# Altium PCB vt18_main_board.PcbDoc (part 2 of 2)
Units mil, origin at the board's own origin, x right, y up, seen from the top; angles counter-clockwise.
Board outline 5511.81 x 5236.22 mil, 4 copper layers (Top Layer, Internal Plane 1, Internal Plane 2, Bottom Layer), stack 30.635 mil thick; 230 components, 148 nets, 952 pads, 623 vias.
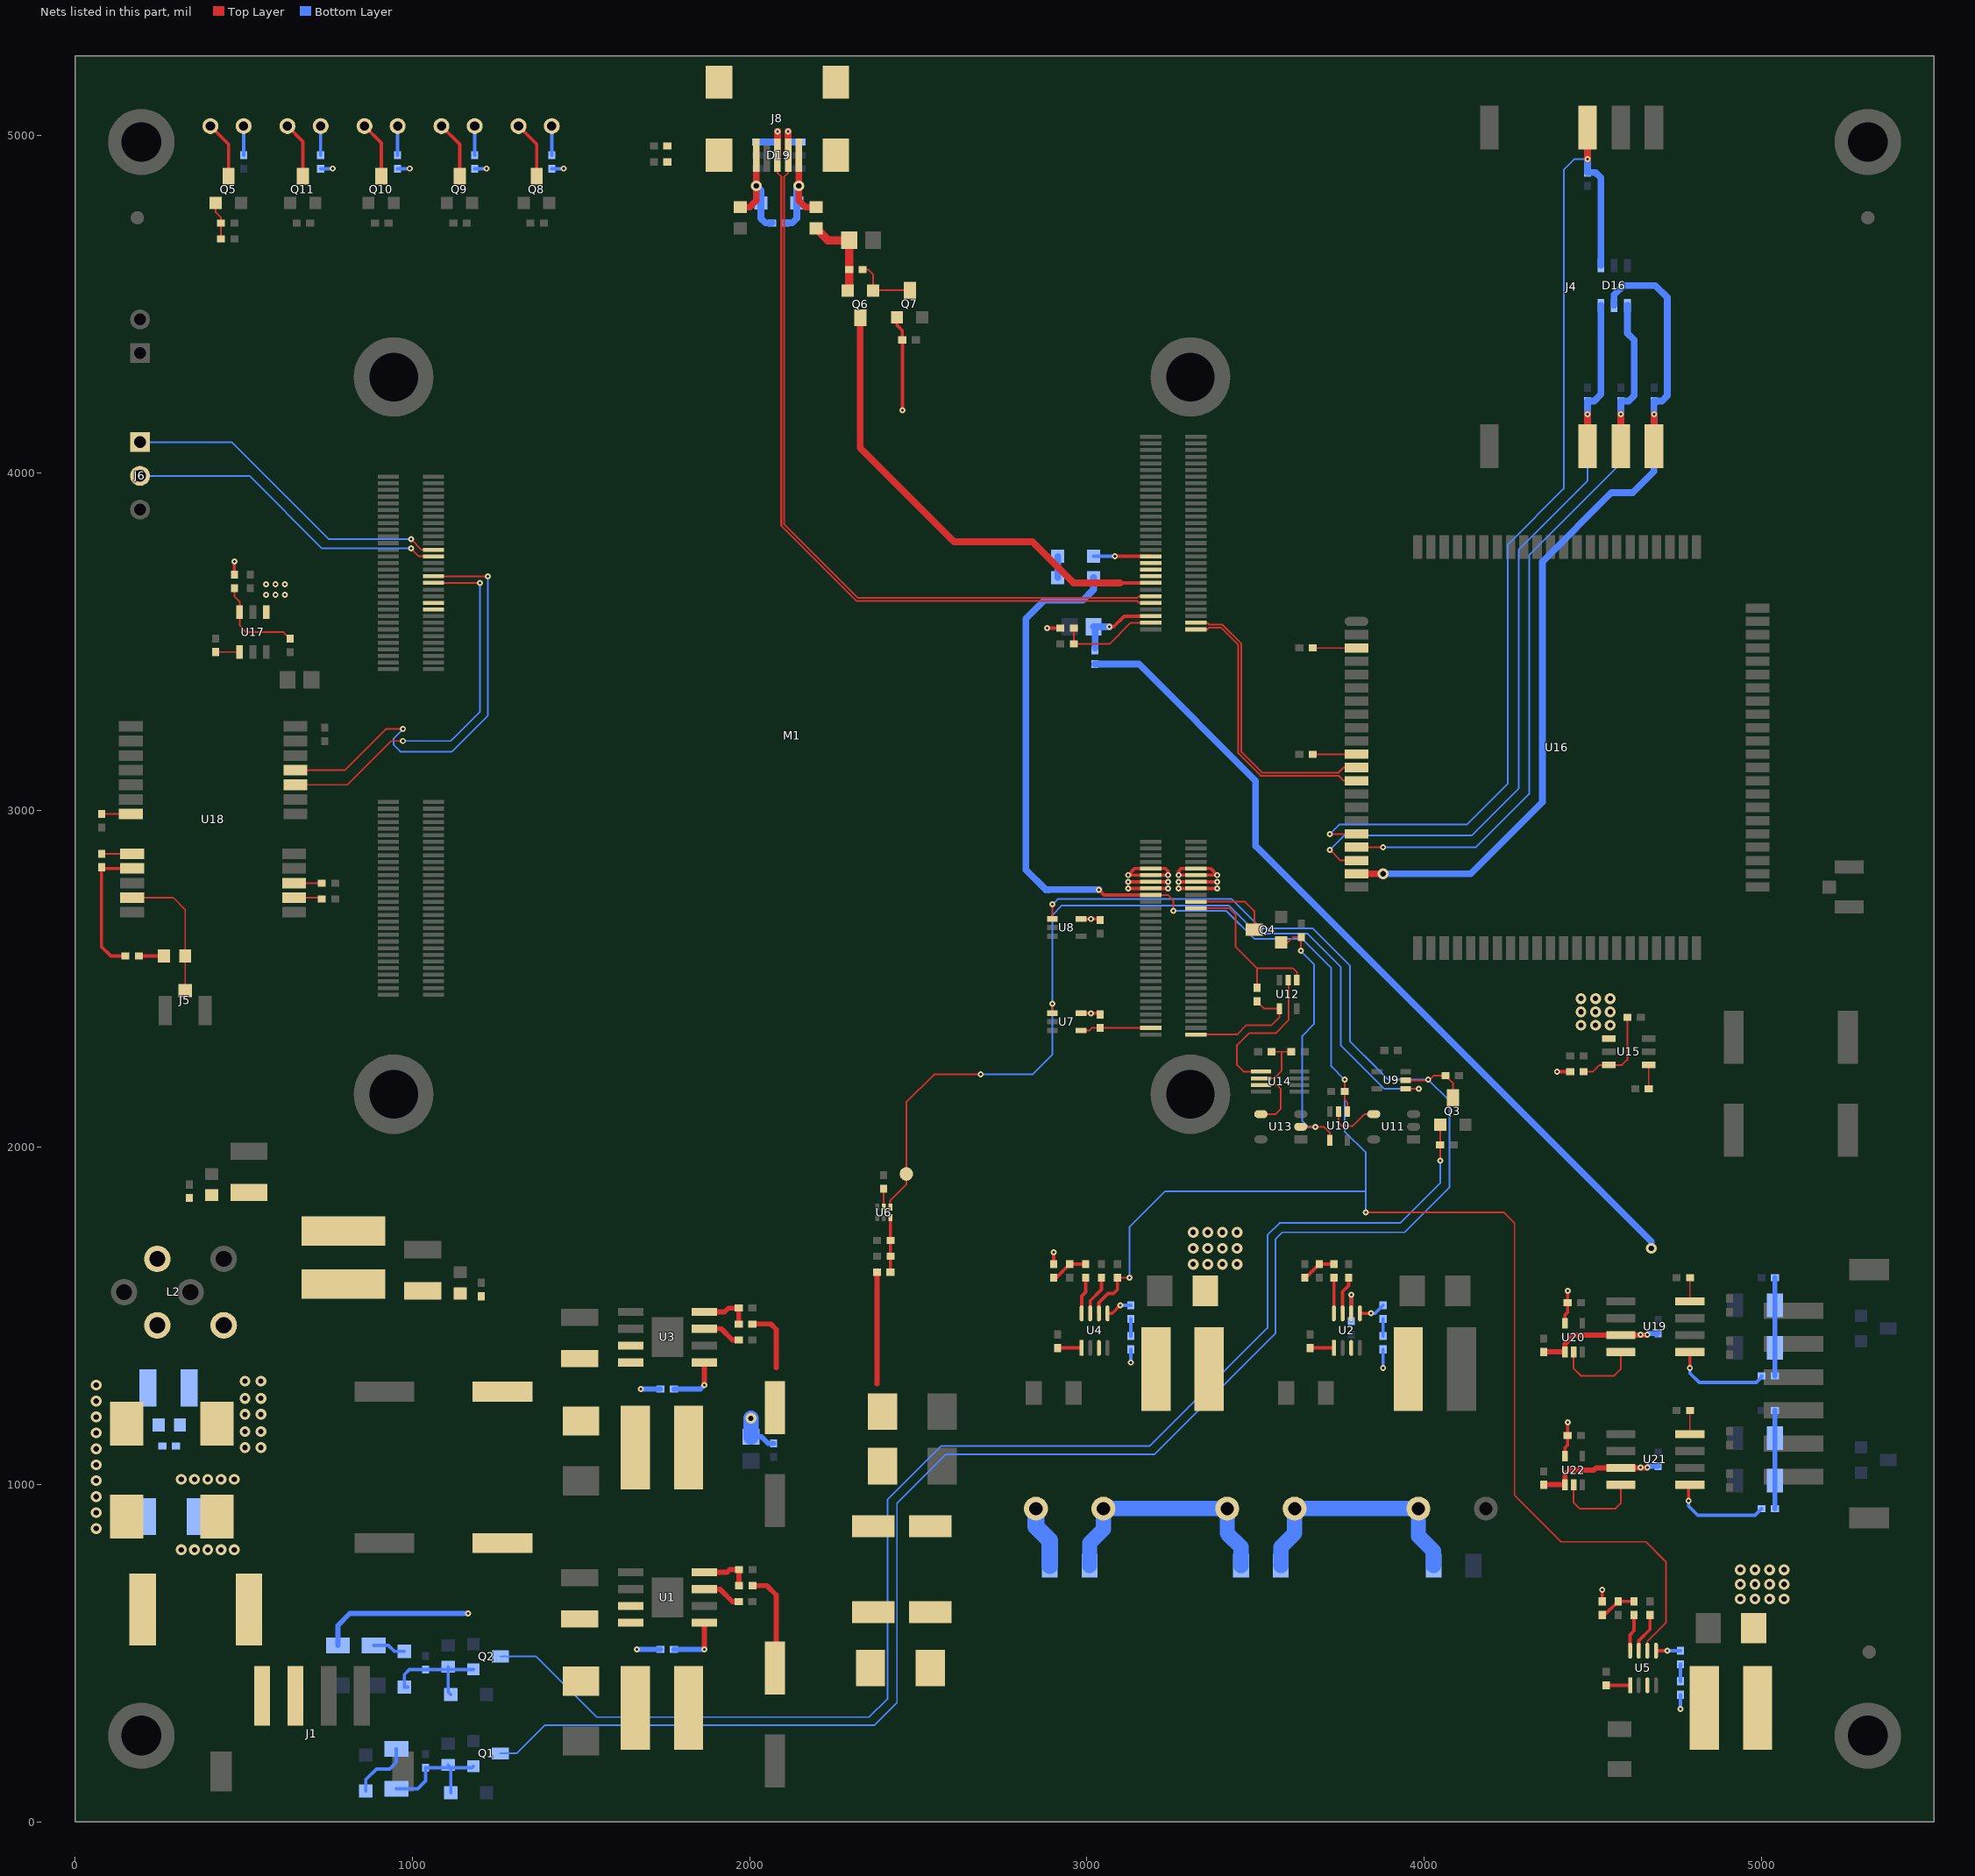
[diagram p4: the nets of this part, all layers, seen from the top]

## Via types
v1: diameter 18, hole 8, Top Layer to Bottom Layer, tented both sides, 433 vias
v2: diameter 32, hole 16, Top Layer to Bottom Layer, tented both sides, 190 vias

## Nets (pads, with @x,y where several pads share a name; then routed paths per layer and width w, separated by ;. In a path a pad name is that pad's centre, name@x,y a point inside that pad or via, vN(x,y) a via of type N, cw(c..) or ccw(c..) an arc to the next point about the centre after c; other vN are vias at no path point) (continued)
MP-LOST: pad. U6.4 U7.1 U9.1 | length 2762.5
  Top Layer w5: U6.4@2417.32,1822.83 2417.32,1842.52 2464.57,1889.76 2464.57,2133.86 2547.24,2216.54 v1(2685.04,2216.54) ; U7.1@2897.64,2397.64 v1(2897.64,2425.2) ; U9.1@3944.88,2173.23 v1(3984.25,2173.23)
  Bottom Layer w5: v1(2685.04,2216.54) 2838.58,2216.54 2897.64,2275.59 v1(2897.64,2425.2) 2897.64,2688.98 2925.95,2717.29 3420.51,2717.29 3503.94,2633.86 3653.54,2633.86 3751.97,2535.43 3751.97,2303.15 3881.89,2173.23 v1(3984.25,2173.23)
MX6-ONOFF: M1.D20 Q4.1 | length 239.8
  Top Layer w5: M1.D20@3322.83,2728.35 3468.5,2728.35 3496.06,2700.79 Q4.1@3496.06,2645.67
NetC1_1: C1.1 C2.1 C4.1 D1.2 D2.2 D3.2 L2.1
  other v2: 62.99,870.08 62.99,917.32 62.99,964.57 62.99,1011.81 62.99,1059.06 62.99,1106.3 62.99,1153.54 62.99,1200.79 62.99,1248.03 62.99,1295.28
NetC6_1: C6.1 C7.1 C8.1 L1.1 L2.3
NetC12_1: C12.1 L3.1 U2.3 | length 54.7
  Bottom Layer w10: v1(3877.95,1346.46) C12.1@3877.95,1401.13
NetC12_2: C12.2 R3.1 | length 50.6
  Bottom Layer w10: C12.2@3877.95,1441.13 R3.1@3877.95,1491.68
NetC14_1: C14.1 D6.2 L4.1 U1.8 | length 70.4
  Bottom Layer w15: v1(1665.35,511.81) C14.1@1735.78,511.81
NetC14_2: C14.2 U1.1 | length 169.1
  Top Layer w15: v1(1866.14,511.81) U1.1@1866.14,590.55
  Bottom Layer w15: C14.2@1775.78,511.81 v1(1866.14,511.81)
NetC17_1: C17.1 D4.1 R4.2 R6.2 R7.1 | length 186.3
  Bottom Layer w50: C17.1@2848.82,929.13 2848.82,875.59 2889.76,834.65 R7.1@2889.76,759.84
NetC17_2: C17.2 C20.1 R7.2 R11.1 | length 739.4
  Bottom Layer w45: R7.2@3007.87,759.84 3007.87,826.77 3048.82,867.72 C17.2@3048.82,929.13 C20.1@3415.75,929.13 3415.75,855.91 3456.69,814.96 R11.1@3456.69,759.84
NetC18_2: C18.2 U2.1 | length 70.9
  Top Layer w10: C18.2@3661.42,1405.32 3732.09,1405.32 U2.1@3732.28,1405.51
NetC20_2: C20.2 C22.1 R11.2 R12.1 | length 741.1
  Bottom Layer w45: R11.2@3574.8,759.84 3574.8,814.96 3615.75,855.91 C20.2@3615.75,929.13 C22.1@3982.68,929.13 3982.68,848.03 4027.56,803.15 R12.1@4027.56,759.84
NetC21_2: C21.2 U2.7 | length 113.4
  Top Layer w10: U2.7@3757.87,1507.87 3757.87,1572.83 3775.59,1590.55 C21.2@3775.59,1613.98
NetC23_1: C23.1 L5.1 U4.3 | length 38.9
  Bottom Layer w10: v1(3129.92,1362.2) C23.1@3129.92,1401.13
NetC23_2: C23.2 R15.1 | length 50.6
  Bottom Layer w10: C23.2@3129.92,1441.13 R15.1@3129.92,1491.68
NetC24_1: C24.1 D8.2 L6.1 U3.8 | length 58.6
  Bottom Layer w15: v1(1677.17,1283.46) C24.1@1735.78,1283.46
NetC24_2: C24.2 U3.1 | length 158.2
  Top Layer w15: v1@1866.14,1299.21 U3.1@1866.14,1362.2
  Bottom Layer w15: C24.2@1775.78,1283.46 1854.33,1283.46 v1(1866.14,1295.28)
NetC31_2: C31.2 U4.1 | length 70.9
  Top Layer w10: C31.2@2913.39,1405.32 2984.06,1405.32 U4.1@2984.25,1405.51
NetC32_2: C32.2 U4.7 | length 120
  Top Layer w10: U4.7@3009.84,1507.87 3009.84,1545.28 3043.31,1578.74 C32.2@3043.31,1613.98
NetC33_1: C33.1 L7.1 U5.3 | length 43.3
  Bottom Layer w10: C33.1@4759.21,377.32 C33.1@4759.84,377.32 v1(4759.84,334.65)
NetC33_2: C33.2 R20.1 | length 50.6
  Bottom Layer w10: C33.2@4759.84,417.32 R20.1@4759.84,467.87
NetC36_1: C36.1 U6.5 | length 54.7
  Top Layer w5: U6.5@2397.64,1822.83 C36.1@2397.64,1877.51
NetC37_2: C37.2 U5.1 | length 70.9
  Top Layer w10: C37.2@4539.37,405.32 4539.56,405.51 U5.1@4610.24,405.51
NetC38_2: C38.2 U5.7 | length 120
  Top Layer w10: U5.7@4635.83,507.87 4635.83,537.4 4669.29,570.87 C38.2@4669.29,613.98
NetC39_1: C39.1 R23.2 R25.1 U6.3 | length 161.5
  Top Layer w10: U6.3@2417.32,1791.34 2417.51,1791.15 R23.2@2417.51,1629.92
NetC40_1: C40.1 D10.2 Q1.2 R28.1 R30.1 | length 364.8
  Bottom Layer w10: R28.1@952.76,98.43 1015.75,98.43 1039.37,122.05 R30.1@1039.37,160.98 C40.1@1114.17,160.98 ; C40.1@1106.3,169.29 1114.17,161.42 C40.1@1114.17,160.98 ; D10.2@1114.17,86.61 C40.1@1114.17,160.98 ; Q1.2@1181.1,165.35 1176.72,160.98 C40.1@1114.17,160.98
NetC41_1: C41.1 D11.2 D12.2 Q2.2 R35.1 | length 344.9
  Bottom Layer w10: D11.2@986.66,399.61 D11.2@976.38,399.61 976.38,437.01 991.68,452.31 R35.1@1039.37,452.31 C41.1@1106.3,452.31 ; C41.1@1106.3,460.63 C41.1@1106.3,452.31 ; D12.2@1114.17,377.95 1106.3,385.83 C41.1@1106.3,452.31 ; Q2.2@1181.1,452.76 1180.66,452.31 C41.1@1106.3,452.31
NetC42_1: C42.1 R38.2 U14.6 | length 185.5
  Top Layer w5: U14.6@3515.75,2204.72 3555.12,2204.72 3576.65,2226.25 3576.65,2283.46 ; R38.2@3547.43,2283.46 3576.65,2283.46 ; C42.1@3605.86,2283.46 3576.65,2283.46
NetC44_2: C44.2 R43.2 U15.6 | length 270.5
  Top Layer w5: R43.2@4472.44,2224.41 4500,2224.41 4519.68,2244.09 U15.6@4547.24,2244.09 4586.61,2244.09 4602.17,2259.65 C44.2@4602.17,2385.83
NetC51_2: C51.2 R51.2 U17.6 | length 288.2
  Top Layer w5: R51.2@476.38,3653.54 R51.2@472.44,3657.48 472.44,3633.86 488.19,3618.11 U17.6@488.19,3586.61 488.19,3547.24 507.87,3527.56 618.3,3527.56 C51.2@637.8,3508.06
NetC59_1: C59.1 R59.2 R60.1 R61.1 | length 291.3
  Bottom Layer w15: R60.1@5039.81,1322.83 C59.1@5039.81,1614.17
NetC65_1: C65.1 R63.2 R64.1 R65.1 | length 291.3
  Bottom Layer w15: R64.1@5039.81,929.13 C65.1@5039.81,1220.47
NetC67_1: C67.1 D20.1 J8.5 L10.2 | length 330.2
  Top Layer w20: L10.2@1972.44,4787.4 2000,4787.4 2019.69,4807.09 J8.5@2019.69,4940.94
  Bottom Layer w20: v2(2019.68,4850.39) 2033.46,4836.61 D20.1@2033.46,4799.21 2033.46,4753.94 2047.24,4740.16 C67.1@2066.49,4740.16
NetD5_2: D5.2 R4.1 R6.1
NetD9_2: D9.2 R28.2 | length 184.6
  Bottom Layer w10: D9.2@862.2,92.52 862.2,125.98 893.7,157.48 933.07,157.48 952.76,177.17 R28.2@952.76,216.54
NetD11_1: D11.1 R34.2 | length 97.9
  Bottom Layer w10: R34.2@885.83,523.62 929.13,523.62 946.85,505.91 D11.1@976.38,505.91
NetD13_1: D13.1 D14.2 | length 63
  Bottom Layer w20: D14.2@2913.39,3688.98 D13.1@2913.39,3751.97
NetD15_1: D15.1 R44.2 | length 86.4
  Bottom Layer w10: R44.2@500,4941.13 D15.1@500,5027.56
NetD15_2: D15.2 Q5.1 | length 170.6
  Top Layer w10: D15.2@401.57,5027.56 455.32,4973.81 Q5.1@455.32,4879.21
NetD21_1: D21.1 R70.2 | length 86.4
  Bottom Layer w10: R70.2@1413.39,4941.13 D21.1@1413.39,5027.56
NetD21_2: D21.2 Q8.1 | length 170.6
  Top Layer w10: D21.2@1314.96,5027.56 1368.71,4973.81 Q8.1@1368.71,4879.21
NetD22_1: D22.1 R71.2 | length 86.4
  Bottom Layer w10: R71.2@1185.04,4941.13 D22.1@1185.04,5027.56
NetD22_2: D22.2 Q9.1 | length 170.6
  Top Layer w10: D22.2@1086.61,5027.56 1140.36,4973.81 Q9.1@1140.36,4879.21
NetD23_1: D23.1 R72.2 | length 86.4
  Bottom Layer w10: R72.2@956.69,4941.13 D23.1@956.69,5027.56
NetD23_2: D23.2 Q10.1 | length 169
  Top Layer w10: D23.2@858.27,5027.56 908.08,4977.75 Q10.1@908.08,4879.21
NetD24_1: D24.1 R73.2 | length 86.4
  Bottom Layer w10: R73.2@728.35,4941.13 D24.1@728.35,5027.56
NetD24_2: D24.2 Q11.1 | length 167.3
  Top Layer w10: D24.2@629.92,5027.56 675.8,4981.69 Q11.1@675.8,4879.21
NetF1_2: F1.2 J1.1
NetJ5_1: J5.1 L8.2 U18.11 | length 416.3
  Top Layer w4.7: U18.11@169.29,2740.16 291.34,2740.16 326.77,2704.72 J5.1@326.77,2460.63
NetL8_1: L8.1 R58.1 | length 70.4
  Top Layer w10: R58.1@189.42,2566.93 L8.1@259.84,2566.93
NetQ1_1: Q1.1 Q3.1 R27.2 U8.1 U9.2 | length 6177.7
  Top Layer w5: U8.1@2897.64,2677.17 v1(2897.64,2720.47) ; U9.2@3944.88,2198.83 v1@4011.81,2198.83 ; v1@4013.79,2198.83 4027.56,2212.6 R27.2@4062.8,2212.6 4085.24,2190.16 Q3.1@4085.24,2146.93
  Bottom Layer w5: Q1.1@1261.1,203.35 1309.65,203.35 1393.7,287.4 2370.08,287.4 2437.01,354.33 2437.01,944.88 2582.68,1090.55 3200.79,1090.55 3559.06,1448.82 3559.06,1728.35 3578.74,1748.03 3940.94,1748.03 4074.8,1881.89 4074.8,2137.8 v1(4011.81,2200.79) 3893.7,2200.79 ; v1(2897.64,2720.47) 2913.39,2736.22 3429.13,2736.22 3515.75,2649.61 3669.29,2649.61 3779.53,2539.37 3779.53,2314.96 3893.7,2200.79 ; 3822.83,2271.65 3893.7,2200.79
NetQ2_1: Q2.1 Q3.2 R31.2 | length 4196.9
  Top Layer w5: v1(4047.24,1960.63) 4047.24,2007.69 R31.2@4047.06,2007.87 4047.24,2008.06 Q3.2@4047.24,2066.93
  Bottom Layer w5: Q2.1@1261.1,490.76 1367.51,490.76 1547.24,311.02 2354.33,311.02 2409.45,366.14 2409.45,956.69 2566.93,1114.17 3185.04,1114.17 3535.43,1464.57 3535.43,1740.16 3570.87,1775.59 3929.13,1775.59 4047.24,1893.7 v1(4047.24,1960.63)
NetQ4_2: Q4.2 R39.1 U10.4 U13.2 | length 803.2
  Top Layer w5: Q4.2@3576.06,2607.67 3595.86,2607.67 3611.17,2622.98 R39.1@3635.12,2622.98 3633.86,2621.72 v1(3633.86,2582.68) ; U13.2@3633.86,2061.02 v1(3677.17,2061.02) 3702.76,2061.02 3720.46,2043.32 U10.4@3720.46,2021.3
  Bottom Layer w5: v1(3633.86,2582.68) 3673.23,2543.31 3673.23,2365.39 3638.55,2330.71 3638.55,2077.99 3655.51,2061.02 v1(3677.17,2061.02)
NetQ5_2: Q5.2 R47.2 R48.2 | length 112.7
  Top Layer w5: Q5.2@417.32,4799.21 417.32,4771.65 432.88,4756.09 R48.2@432.88,4740.16 R47.2@432.88,4692.91
NetQ6_1: Q6.1 Q7.1 R67.1 | length 194.5
  Top Layer w5: R67.1@2335.09,4602.36 2350.83,4602.36 2366.14,4587.06 Q6.1@2366.14,4539.37 2367.4,4540.63 Q7.1@2475.01,4540.63
NetR1_1: R1.1 R2.1 U1.4 | length 152.7
  Top Layer w15: U1.4@1866.14,740.55 1933.46,740.55 1940.95,748.03 R1.1@1968.5,748.03 R2.1@1968.5,700.79
NetR3_2: R3.2 U2.5 | length 78.8
  Top Layer w10: U2.5@3809.06,1507.87 v1(3842.52,1507.87)
  Bottom Layer w10: v1(3842.52,1507.87) 3854.14,1507.87 R3.2@3877.95,1531.68
NetR5_1: R5.1 U2.6 | length 117.7
  Top Layer w10: U2.6@3783.46,1523.62 v1(3783.46,1562.99)
  Bottom Layer w10: R5.1@3783.46,1484.69 v1(3783.46,1562.99)
NetR8_1: R8.1 R9.2 R10.1 | length 103.2
  Top Layer w10: R9.2@3645.67,1613.98 3648.98,1613.98 R10.1@3688.98,1653.98 R8.1@3732.28,1653.98
NetR8_2: R8.2 U2.8 | length 106.1
  Top Layer w10: U2.8@3732.28,1507.87 R8.2@3732.28,1613.98
NetR13_1: R13.1 R14.1 U3.4 | length 153.9
  Top Layer w15: U3.4@1866.14,1512.2 1925.59,1512.2 1937.01,1523.62 R13.1@1968.06,1523.62 R14.1@1968.06,1476.38
NetR15_2: R15.2 U4.5 | length 78.8
  Top Layer w10: U4.5@3061.02,1507.87 3074.8,1507.87 v1(3098.43,1531.5)
  Bottom Layer w10: v1(3098.43,1531.5) 3129.73,1531.5 R15.2@3129.92,1531.68
NetR16_1: R16.1 R17.2 R18.1 | length 111.1
  Top Layer w10: R17.2@2901.57,1613.98 2908.82,1613.98 R18.1@2948.82,1653.98 R16.1@2996.06,1653.98
NetR16_2: R16.2 U4.8 | length 111
  Top Layer w10: U4.8@2984.25,1507.87 2984.25,1559.06 2996.06,1570.87 R16.2@2996.06,1613.98
NetR20_2: R20.2 U5.5 | length 72.8
  Top Layer w10: U5.5@4687.01,507.87 v1(4720.47,507.87)
  Bottom Layer w10: v1(4720.47,507.87) R20.2@4759.84,507.87
NetR21_1: R21.1 R22.2 R24.1 | length 111.1
  Top Layer w10: R22.2@4527.56,613.98 4534.8,613.98 R24.1@4574.8,653.98 R21.1@4622.05,653.98
NetR21_2: R21.2 U5.8 | length 111
  Top Layer w10: U5.8@4610.24,507.87 4610.24,555.12 4622.05,566.93 R21.2@4622.05,613.98
NetR45_2: R45.2 U15.1 | length 72.6
  Top Layer w5: U15.1@4665.35,2244.09 4665.35,2177.35 R45.2@4669.48,2173.23
NetR49_2: R49.2 U16.3 | length 129.7
  Top Layer w4.7: R49.2@3669.48,3480.31 U16.3@3799.21,3480.31
NetR50_2: R50.2 U16.11 | length 129.7
  Top Layer w4.7: R50.2@3669.48,3165.35 U16.11@3799.21,3165.35
NetR52_2: R52.2 U17.1 | length 70.9
  Top Layer w5: R52.2@417.32,3468.31 417.51,3468.5 U17.1@488.19,3468.5
NetR54_1: R54.1 U18.14 | length 83.9
  Top Layer w5: U18.14@649.61,2740.16 727.91,2740.16 R54.1@731.84,2736.22
NetR55_1: R55.1 U18.15 | length 82.2
  Top Layer w5: U18.15@649.61,2783.46 R55.1@731.84,2783.46
NetR56_1: R56.1 R58.2 U18.9 | length 409.9
  Top Layer w5: R56.1@78.74,2830.27 R56.1@82.24,2826.77
  Top Layer w10: R56.1@78.74,2830.27 78.74,2594.49 106.3,2566.93 R58.2@149.42,2566.93 ; R56.1@82.24,2826.77 U18.9@169.29,2826.77
NetR56_2: R56.2 U18.8 | length 90.6
  Top Layer w5: R56.2@78.74,2870.27 78.93,2870.08 U18.8@169.29,2870.08
NetR57_2: R57.2 U18.7 | length 86.7
  Top Layer w5: R57.2@78.74,2988.38 78.93,2988.19 U18.7@165.35,2988.19
NetR60_2: R60.2 U19.5 | length 297.2
  Top Layer w10: v1(4787.4,1346.46) U19.5@4787.4,1393.5
  Bottom Layer w10: v1(4787.4,1346.46) 4787.4,1330.71 4814.96,1303.15 4984.25,1303.15 4999.81,1318.71 R60.2@4999.81,1322.83
NetR62_1: R62.1 U19.8 | length 70.9
  Top Layer w5: U19.8@4787.4,1543.5 4787.4,1613.73 R62.1@4787.84,1614.17
NetR64_2: R64.2 U21.5 | length 300.2
  Top Layer w10: v1(4783.46,952.76) 4783.46,995.87 U21.5@4787.4,999.8
  Bottom Layer w10: v1(4783.46,952.76) 4783.46,937.01 4810.83,909.64 4980.32,909.64 R64.2@4999.81,929.13
NetR66_1: R66.1 U21.8 | length 70.9
  Top Layer w5: U21.8@4787.4,1149.8 4787.4,1220.03 R66.1@4787.84,1220.47
NetR78_1: R78.1 U1.3 | length 117.3
  Top Layer w15: U1.3@1866.14,690.55 1911.81,690.55 1948.82,653.54 R78.1@1968.06,653.54
NetR79_1: R79.1 U3.3 | length 115.6
  Top Layer w15: U3.3@1866.14,1462.2 1915.75,1462.2 1948.82,1429.13 R79.1@1968.06,1429.13
NetU10_2: U10.2 U11.4 | length 156.6
  Top Layer w5: U10.2@3746.06,2106.3 3746.06,2072.84 3755.91,2062.99 3787.4,2062.99 3822.83,2098.43 U11.4@3850.39,2098.43
NetU12_2: U12.2 U14.5 | length 441.5
  Top Layer w5: U14.5@3515.75,2224.41 3464.57,2224.41 3444.88,2244.09 3444.88,2303.15 3480.32,2338.58 3559.06,2338.58 3598.43,2377.95 3598.43,2494.09 U12.2@3596.45,2496.06
NetU13_4: U13.4 U14.7 | length 188.6
  Top Layer w5: U13.4@3515.75,2098.43 3559.06,2098.43 3574.8,2114.17 3574.8,2173.23 3562.99,2185.04 U14.7@3515.75,2185.04
NetU19_4: U19.4 U20.2 | length 257.1
  Top Layer w5: U20.2@4442.92,1393.7 4442.92,1344.48 4464.57,1322.83 4562.99,1322.83 4582.68,1342.52 U19.4@4582.68,1393.5
NetU21_4: U21.4 U22.2 | length 261.7
  Top Layer w5: U22.2@4442.92,1000 4442.92,946.84 4460.63,929.13 4566.93,929.13 4582.68,944.88 U21.4@4582.68,999.8
OTG-ID: M1.C43
OTG-OC: M1.C41
OTG-PWREN: M1.C39
OTG-SH-GND: C68.2 J8.6 J8.7 J8.8 J8.9 R69.1
OTG_N: D19.4 J8.2 M1.C49 | length 2406.7
  Top Layer w5.3: J8.2@2114.17,4940.94 2114.17,4889.08 2102.93,4877.83 2102.93,3846.81 2321.22,3628.52 3149.49,3628.52 3154.83,3633.86 M1.C49@3188.98,3633.86
  Top Layer w20: J8.2@2114.17,4940.94 v1(2114.17,5011.81)
  Bottom Layer w20: v1(2114.17,5011.81) 2114.17,4988.19 2122.05,4980.31 D19.4@2145.67,4980.31
OTG_P: D19.3 J8.3 M1.C51 | length 2445.3
  Top Layer w5.3: J8.3@2082.68,4940.94 2082.68,4889.08 2093.93,4877.83 2093.93,3843.08 2317.49,3619.52 3149.49,3619.52 3154.83,3614.17 M1.C51@3188.98,3614.17
  Top Layer w20: J8.3@2082.68,4940.94 v1(2082.68,5011.81)
  Bottom Layer w20: D19.3@2027.56,4980.31 2074.8,4980.31 2082.68,4988.19 v1(2082.68,5011.81)
OTGVBUS: C66.2 L9.1 Q6.2 R67.2 | length 264.4
  Top Layer w25: L9.1@2196.85,4724.41 2232.28,4688.98 C66.2@2295.28,4688.98 2295.28,4543.5 Q6.2@2291.14,4539.37
P2V8-OUT: D14.1 M1.D17 R19.1 R36.1 U4.6 U5.6 U10.1 | length 6071.7
  Top Layer w5: R19.1@3090.55,1613.73 3090.99,1614.17 v1(3125.98,1614.17) ; M1.D17@3188.98,2748.03 3240.16,2748.03 3255.91,2732.28 v1(3255.91,2700.79) ; v1(3763.78,2200.79) 3763.78,2165.8 R36.1@3764.22,2165.35 3764.22,2141.29 3771.65,2133.86 U10.1@3771.65,2106.3 ; v1(3826.77,1807.09) 4236.22,1807.09 4267.72,1775.59 4267.72,968.5 4405.51,830.71 4657.48,830.71 4716.54,771.65 4716.54,590.55 4661.42,535.43 U5.6@4661.42,507.87
  Top Layer w10: U4.6@3035.43,1507.87 3035.43,1539.37 3062.99,1566.93 3078.74,1566.93 3090.55,1578.74 R19.1@3090.55,1613.73 ; v1(3035.43,2763.78) 3051.18,2748.03 M1.D17@3188.98,2748.03
  Bottom Layer w5: v1(3125.98,1614.17) 3125.98,1763.78 3232.28,1870.08 3826.77,1870.08 ; v1(3255.91,2700.79) 3413.39,2700.79 3496.06,2618.11 3637.8,2618.11 3724.41,2531.5 3724.41,2240.16 v1(3763.78,2200.79) 3763.78,2047.24 3826.77,1984.25 3826.77,1870.08 ; v1(3826.77,1807.09) 3826.77,1870.08
  Bottom Layer w20: D14.1@3019.68,3688.98 3019.68,3653.54 2988.19,3622.05 2874.02,3622.05 2818.9,3566.93 2818.9,2822.83 2877.95,2763.78 2887.32,2763.78 2887.7,2764.16 3035.06,2764.16 v1(3035.43,2763.78)
P3V3: C28.1 C57.1 C63.1 L5.2 M1.D9 M1.D10 M1.D11 M1.D12 M1.D13 M1.D14 M1.D15 M1.D16 Q7.2 R17.1 R26.1 R29.1 R40.2 R43.1 R51.1 R68.2 R70.1 R71.1 R72.1 R73.1 U7.5 U8.5 U15.4 U17.4 U20.5 U22.5 | length 1871.2
  Top Layer w10: R51.1@472.44,3697.48 v1(472.44,3736.41) ; Q7.2@2437.01,4460.63 2437.01,4437.2 2452.57,4421.65 R68.2@2452.57,4393.7 2452.95,4393.32 2452.76,4393.12 v1(2452.76,4185.04) ; v1(2881.89,3539.37) R40.2@2921.07,3539.37 ; R17.1@2901.57,1653.98 v1(2901.57,1688.98) ; U7.5@2982.64,2397.64 3035.87,2397.64 R26.1@3039.37,2394.14 ; U8.5@2982.64,2677.17 3035.87,2677.17 R29.1@3039.37,2673.67 ; v1(3122.05,2767.72) M1.D15@3188.98,2767.72 v1(3240.16,2767.72) ; v1(3122.05,2787.4) M1.D13@3188.98,2787.4 v1(3240.16,2787.4) ; v1(3271.65,2767.72) M1.D16@3322.83,2767.72 v1(3385.83,2767.72) ; v1(3271.65,2787.4) M1.D14@3322.83,2787.4 v1(3385.83,2787.4) ; v1(4393.7,2224.41) R43.1@4432.44,2224.41 ; U22.5@4417.32,1085 4417.32,1110.24 4424.76,1117.67 C63.1@4424.76,1145.67 4424.76,1184.6 v1(4425.2,1185.04) ; U20.5@4417.32,1478.7 4417.32,1503.94 4424.76,1511.37 C57.1@4424.76,1539.37 4424.76,1574.36 v1(4425.2,1574.8) ; v1(3122.05,2807.09) M1.D11@3188.98,2807.09 v1(3240.16,2807.09) 3240.16,2818.9 3232.28,2826.77 M1.D9@3188.98,2826.77 3141.73,2826.77 v1(3122.05,2807.09) ; v1(3271.65,2807.09) 3271.65,2818.9 3279.53,2826.77 M1.D10@3322.83,2826.77 3366.14,2826.77 v1(3385.83,2807.09) M1.D12@3322.83,2807.09 v1(3271.65,2807.09)
  Bottom Layer w10: R73.1@728.35,4901.13 763.34,4901.13 v1(763.78,4901.57) ; R72.1@956.69,4901.13 991.68,4901.13 v1(992.13,4901.57) ; R71.1@1185.04,4901.13 1220.03,4901.13 v1(1220.47,4901.57) ; R70.1@1413.39,4901.13 1448.38,4901.13 v1(1448.82,4901.57)
  other v1: 3011.81,2397.64 3011.81,2677.17 566.93,3637.8 594.49,3637.8 622.05,3637.8 566.93,3669.29 594.49,3669.29 622.05,3669.29
  other v2: 3314.96,1653.54 3358.27,1653.54 3401.57,1653.54 3444.88,1653.54 3314.96,1700.79 3358.27,1700.79 3401.57,1700.79 3444.88,1700.79 3314.96,1748.03 3358.27,1748.03 3401.57,1748.03 3444.88,1748.03 4464.57,2362.2 4507.87,2362.2 4551.18,2362.2 4464.57,2401.57 4507.87,2401.57 4551.18,2401.57 4464.57,2440.94 4507.87,2440.94 4551.18,2440.94
P5V0: C35.1 C55.1 C56.1 C61.1 C62.1 L7.2 R22.1 R42.2 U19.3 U20.1 U21.3 U22.1 | length 3284.7
  Top Layer w10: R22.1@4527.56,653.98 v1(4527.56,688.98)
  Top Layer w15: C62.1@4354.33,999.56 4354.77,1000 U22.1@4417.32,1000 4417.32,1031.5 4429.13,1043.31 4502.66,1043.31 4509.15,1049.8 U21.3@4582.68,1049.8 4660.04,1049.8 v1(4661.42,1051.18) ; C56.1@4354.33,1393.26 4354.77,1393.7 U20.1@4417.32,1393.7 4417.32,1417.32 4443.5,1443.5 U19.3@4582.68,1443.5 v1@4660.04,1443.5
  Bottom Layer w15: v1(4661.42,1051.18) 4664.91,1054.68 C61.1@4692.91,1054.68 ; v1(4661.42,1444.88) 4664.91,1448.38 C55.1@4692.91,1448.38 C55.1@4689.42,1444.88
  Bottom Layer w20: R42.2@3023.62,3432.88 3153.73,3432.88 3500,3086.61 3500,2893.7 4673.23,1720.47 v2(4673.23,1700.79)
  other v1: 4641.73,1051.18 4641.73,1444.88
  other v2: 4937.01,661.42 4980.32,661.42 5023.62,661.42 5066.93,661.42 4937.01,704.72 4980.32,704.72 5023.62,704.72 5066.93,704.72 4937.01,748.03 4980.32,748.03 5023.62,748.03 5066.93,748.03
P8V0: C19.1 D5.1 L4.2 R2.2 | length 219.4
  Top Layer w15: R2.2@2008.5,700.79 2051.18,700.79 2078.74,673.23 2078.74,535.43
P8V5: C27.2 C29.2 C30.1 D7.1 L6.2 R14.2 R23.1 | length 652.6
  Top Layer w15: R14.2@2008.06,1476.38 2062.99,1476.38 2078.74,1460.63 2078.74,1346.46 ; 2377.51,1298.77 R23.1@2377.51,1629.92
  Bottom Layer w15: C27.2@2003.94,1141.73 2035.43,1141.73 2054.93,1122.24 C29.2@2070.87,1122.24
  Bottom Layer w45: C27.2@2003.94,1141.73 v2(2003.94,1196.85)
PGND: C1.2 C2.2 C4.2 D3.1 J1.2 L2.2
  other v2: 503.94,1110.24 551.18,1110.24 503.94,1157.48 551.18,1157.48 503.94,1208.66 551.18,1208.66 503.94,1255.91 551.18,1255.91 503.94,1307.09 551.18,1307.09
PMIC-ON-REQ: M1.D22 R37.1 U12.1 | length 515.1
  Top Layer w5: M1.D22@3322.83,2708.66 3421.26,2708.66 3440.94,2688.98 3440.94,2594.49 3503.94,2531.5 ; R37.1@3503.94,2472.88 3503.94,2531.5 ; U12.1@3622.05,2496.06 3622.05,2519.69 3610.24,2531.5 3503.94,2531.5
PMIC-PWRON: M1.D60 R37.2 U12.4 | length 370.4
  Top Layer w5: M1.D60@3322.83,2334.65 3444.88,2334.65 3472.44,2362.2 3547.24,2362.2 3570.85,2385.81 U12.4@3570.85,2411.06 3525.76,2411.06 R37.2@3503.94,2432.88
PWR-STATUS: M1.D57 R26.2 U7.4 | length 209.6
  Top Layer w5: U7.4@2982.64,2346.44 3007.86,2346.44 3015.75,2354.33 M1.D57@3188.98,2354.33
PWRIN: D1.1 D2.1 F1.1
  other v2: 314.96,807.09 354.33,807.09 393.7,807.09 433.07,807.09 472.44,807.09 314.96,1015.75 354.33,1015.75 393.7,1015.75 433.07,1015.75 472.44,1015.75
RGMII-PWR: D13.2 M1.C37 | length 169.3
  Top Layer w10: v1(3082.68,3751.97) M1.C37@3188.98,3751.97
  Bottom Layer w10: D13.2@3019.68,3751.97 v1(3082.68,3751.97)
SIMCLK: C48.1 D16.6 J4.3 U16.19 | length 2365.8
  Top Layer w5: v1(3720.47,2881.89) 3751.97,2850.39 U16.19@3799.21,2850.39
  Top Layer w20: J4.3@4484.25,4078.74 v1(4484.25,4173.23)
  Bottom Layer w5: v1(3720.47,2881.89) 3763.78,2925.2 4141.73,2925.2 4279.53,3062.99 4279.53,3771.65 4484.25,3976.38 v1(4484.25,4173.23)
  Bottom Layer w20: v1(4484.25,4173.23) C48.1@4484.25,4212.16 4503.5,4212.16 4523.62,4232.28 D16.6@4523.62,4496.06
SIMDATA: C47.1 D16.1 J4.6 U16.17 | length 3078.9
  Top Layer w5: v1(3720.47,2929.13) U16.17@3799.21,2929.13
  Top Layer w20: v1(4484.25,4929.13) J4.6@4484.25,5023.62
  Bottom Layer w5: v1(3720.47,2929.13) 3748.03,2956.69 4125.98,2956.69 4248.03,3078.74 4248.03,3787.4 4413.39,3952.76 4413.39,4897.64 4444.88,4929.13 v1(4484.25,4929.13)
  Bottom Layer w20: v1(4484.25,4929.13) C47.1@4484.25,4890.2 4507.43,4890.2 4523.62,4874.02 D16.1@4523.62,4614.17
SIMRST: C50.1 D16.4 J4.2 U16.18 | length 2270.9
  Top Layer w5: U16.18@3799.21,2889.76 v1(3877.95,2889.76)
  Top Layer w20: J4.2@4582.68,4078.74 v1(4582.68,4173.23)
  Bottom Layer w5: v1(3877.95,2889.76) 4153.54,2889.76 4311.02,3047.24 4311.02,3755.91 4582.68,4027.56 v1(4582.68,4173.23)
  Bottom Layer w20: v1(4582.68,4173.23) C50.1@4582.68,4212.16 4605.86,4212.16 4622.05,4228.35 4622.05,4393.7 4602.36,4413.39 D16.4@4602.36,4496.06
SIMVCC: C49.1 D16.5 J4.1 U16.20 | length 2648.6
  Top Layer w20: U16.20@3799.21,2811.02 v2(3877.95,2811.02) ; J4.1@4681.1,4078.74 v1(4681.1,4173.23)
  Bottom Layer w20: v2(3877.95,2811.02) 4137.8,2811.02 4350.39,3023.62 4350.39,3736.22 4555.12,3940.94 4618.11,3940.94 4681.1,4003.94 v1(4681.1,4173.23) C49.1@4681.1,4212.16 4704.28,4212.16 4720.47,4228.35 4720.47,4519.68 4685.04,4555.12 4590.55,4555.12 4562.99,4527.56 D16.5@4562.99,4496.06
UART1-RXD: J6.2 M1.A26 | length 968.9
  Top Layer w5: v1(996.06,3775.59) 1019.69,3751.97 M1.A26@1062.99,3751.97
  Bottom Layer w5: J6.2@192.91,3990.55 517.32,3990.55 732.28,3775.59 v1(996.06,3775.59)
UART1-TXD: J6.1 M1.A24 | length 1002.2
  Top Layer w5: v1(996.06,3803.15) 1027.56,3771.65 M1.A24@1062.99,3771.65
  Bottom Layer w5: J6.1@192.91,4090.55 464.57,4090.55 751.97,3803.15 v1(996.06,3803.15)
UART3-RXD: M1.A34 U18.20 | length 1156.6
  Top Layer w5: U18.20@653.54,3074.8 807.09,3074.8 937.01,3204.72 v1(972.44,3204.72) ; M1.A34@1062.99,3673.23 v1(1200.79,3673.23)
  Bottom Layer w5: v1(972.44,3204.72) 1114.17,3204.72 1200.79,3291.34 v1(1200.79,3673.23)
UART3-TXD: M1.A32 U18.21 | length 1334.6
  Top Layer w5: U18.21@653.54,3118.11 799.21,3118.11 921.26,3240.16 v1(972.44,3240.16) ; M1.A32@1062.99,3692.91 v1(1224.41,3692.91)
  Bottom Layer w5: v1(972.44,3240.16) 944.88,3212.6 944.88,3192.91 964.57,3173.23 1118.11,3173.23 1224.41,3279.53 v1(1224.41,3692.91)
UART4-RXD: M1.A42
UART4-TXD: M1.A40
USB-H1-OC: M1.C57 R40.1 R41.1 | length 301.2
  Top Layer w5: R40.1@2961.07,3539.37 R41.1@2961.07,3492.13 3066.93,3492.13 3129.92,3555.12 M1.C57@3188.98,3555.12
USB-H1-VBUS: C43.1 M1.C55 R42.1 | length 247.1
  Top Layer w10: v1(3066.93,3543.31) 3078.74,3543.31 3110.24,3574.8 M1.C55@3188.98,3574.8
  Bottom Layer w10: C43.1@3019.68,3543.31 C43.1@3024.06,3538.93
  Bottom Layer w20: C43.1@3019.68,3543.31 v1(3066.93,3543.31) ; R42.1@3024.06,3480.31 C43.1@3024.06,3538.93
USB-HOST_N: M1.C58 U16.12 | length 854.9
  Top Layer w5.3: M1.C58@3322.83,3555.12 3356.98,3555.12 3362.32,3549.78 3401.37,3549.78 3457.82,3493.32 3457.82,3172.1 3519.12,3110.8 3745.94,3110.8 3761.13,3125.98 U16.12@3799.21,3125.98
USB-HOST_P: M1.C60 U16.13 | length 854.9
  Top Layer w5.3: M1.C60@3322.83,3535.43 3356.98,3535.43 3362.32,3540.78 3397.64,3540.78 3448.82,3489.59 3448.82,3168.37 3515.39,3101.8 3745.94,3101.8 3761.13,3086.61 U16.13@3799.21,3086.61
USB-OTG-VBUS: M1.C45 Q6.3 | length 1412.5
  Top Layer w10: 3098.43,3673.23 M1.C45@3188.98,3673.23
  Top Layer w20: Q6.3@2328.14,4459.37 2328.14,4073.43 2606.3,3795.28 2838.58,3795.28 2960.63,3673.23 3098.43,3673.23
VBAT: C3.1 C5.1 C9.1 C10.1 C11.1 C15.1 C25.1 L1.2 R33.1 U1.7 U3.7 | length 459.6
  Bottom Layer w15: R33.1@779.53,523.62 779.53,582.68 814.96,618.11 v1(1165.35,618.11)
VBUSF: C67.2 D20.2 J8.1 L9.2 | length 331.1
  Top Layer w20: J8.1@2145.67,4940.94 2145.67,4807.09 2165.35,4787.4 L9.2@2196.85,4787.4
  Bottom Layer w20: C67.2@2106.49,4740.16 2125.98,4740.16 2139.76,4753.94 D20.2@2139.76,4799.21 2139.76,4844.49 v2(2145.67,4850.39)
pads on no net: D16.3 D19.1 D19.5 D19.6 Designator49. Designator50. Designator51. Designator52. Designator53. Designator54. J4. J4.5 J8.4 M1. M1.A1 M1.A2 M1.A3 M1.A4 M1.A6 M1.A7 M1.A8 M1.A9 M1.A10 M1.A12 M1.A13 M1.A14 M1.A15 M1.A16 M1.A18 M1.A19 M1.A21 M1.A22 M1.A23 M1.A27 M1.A29 M1.A33 M1.A35 M1.A36 M1.A38 M1.A39 M1.A41 M1.A45 M1.A46 M1.A47 M1.A51 M1.A52 M1.A53 M1.A54 M1.B1 M1.B3 M1.B4 M1.B5 M1.B6 M1.B7 M1.B8 M1.B9 M1.B10 M1.B11 M1.B12 M1.B13 M1.B14 M1.B15 M1.B16 M1.B17 M1.B18 M1.B19 M1.B20 M1.B21 M1.B22 M1.B23 M1.B24 M1.B25 M1.B26 M1.B28 M1.B29 M1.B30 M1.B31 M1.B32 M1.B33 M1.B34 M1.B35 M1.B36 M1.B37 M1.B38 M1.B39 M1.B40 M1.B41 M1.B42 M1.B43 M1.B44 M1.B45 M1.B46 M1.B47 M1.B48 M1.B49 M1.B50 M1.B51 M1.B52 M1.B53 M1.B54 M1.C1 M1.C2 M1.C3 M1.C4 M1.C5 M1.C6 M1.C7 M1.C8 M1.C9 M1.C10 M1.C11 M1.C12 M1.C13 M1.C14 M1.C15 M1.C16 M1.C17 M1.C18 M1.C19 M1.C20 M1.C21 M1.C22 M1.C23 M1.C24 M1.C25 M1.C26 M1.C27 M1.C28 M1.C29 M1.C30 M1.C31 M1.C32 M1.C33 M1.C34 M1.C35 M1.C36 M1.C38 M1.C40 M1.C42 M1.C44 M1.C46 M1.C48 M1.C50 M1.C59 M1.D18 M1.D19 M1.D21 M1.D23 M1.D24 M1.D25 M1.D27 M1.D32 M1.D34 M1.D35 M1.D36 M1.D37 M1.D38 M1.D39 M1.D40 M1.D42 M1.D44 M1.D46 M1.D48 M1.D49 M1.D50 M1.D52 M1.D54 M1.D55 M1.D56 U1.2 U1.5 U3.2 U3.5 U11.1 U13.1 U14.3 U16.4 U16.6 U16.7 U16.8 U16.9 U16.15 U16.16 U16.21 U16.22 U16.23 U16.24 U16.25 U16.26 U16.27 U16.28 U16.29 U16.30 U16.31 U16.32 U16.33 U16.34 U16.35 U16.36 U16.42 U16.44 U16.45 U16.46 U16.47 U16.48 U16.49 U16.50 U16.52 U16.53 U16.54 U16.55 U16.56 U16.59 U16.66 U16.67 U16.68 U16.69 U16.70 U16.71 U16.72 U16.73 U16.74 U16.75 U16.76 U16.79 U16.83 U16.84 U16.85 U16.86 U16.87 U18.1 U18.2 U18.3 U18.4 U18.5 U18.6 U18.16 U18.17 U18.18 U18.19 U18.22

## Polygon pours and split planes (outlines as drawn)
GND on Top Layer "Top Layer-No Net 1" (solid, remove dead copper, pour order 75): 2854.33,1409.45 2881.89,1437.01 2940.94,1437.01 2952.76,1448.82 2952.76,1547.24 2968.5,1562.99 2972.44,1566.93 2972.44,1637.8 2980.32,1645.67 3141.73,1645.67 3149.61,1637.8 3149.61,1527.56 3161.42,1515.75 3248.03,1515.75 3248.03,1519.69 3259.84,1531.5 3259.84,1775.59 3283.46,1799.21 3476.38,1799.21 3500,1775.59 3500,1192.91 3519.68,1173.23 3610.24,1173.23 3625.98,1188.98 3625.98,1421.26 3641.73,1437.01 3677.17,1437.01 3700.79,1460.63 3708.66,1468.5 3708.66,1562.99 3708.66,1622.05 3720.47,1633.86 3807.09,1633.86 3834.65,1606.3 3858.27,1582.68 3858.27,1559.06 3858.27,1535.43 3877.95,1515.75 3996.06,1515.75 4007.87,1527.56 4007.87,1767.72 4035.43,1795.28 4305.24,1795.28 4332.8,1767.72 5511.81,1767.72 5511.81,5236.22 0,5236.22 0,2154.25 20.39,2133.86 681.1,2133.86 712.6,2102.36 842.52,1972.44 2854.33,1972.44
GND on Top Layer "Top Layer-No Net 1" (solid, remove dead copper, pour order 74): 5145.67,393.7 5145.67,759.84 5145.67,783.46 5118.11,811.02 5110.24,818.9 5035.43,818.9 4925.2,818.9 4720.47,818.9 4692.91,846.46 4677.17,862.2 4496.06,862.2 4413.39,862.2 4311.02,964.57 4287.4,988.19 4287.4,1192.91 4287.4,1767.72 5401.57,1767.72 5511.81,1767.72 5511.81,393.7
GND on Top Layer "Top Layer-No Net 1" (solid, remove dead copper, pour order 73): 20.39,2133.86 681.1,2133.86 681.1,1921.26 929.13,1921.26 968.5,1881.89 968.5,1665.35 984.25,1649.61 988.19,1645.67 1035.43,1645.67 1090.55,1645.67 1122.05,1614.17 1173.23,1614.17 1188.98,1598.43 1228.35,1598.43 1240.16,1598.43 1275.59,1598.43 1326.77,1547.24 1381.89,1492.13 1417.32,1456.69 1452.76,1456.69 1523.62,1456.69 1566.93,1456.69 1578.74,1468.5 1582.68,1472.44 1582.68,1523.62 1582.68,1543.31 1598.43,1559.06 1688.98,1559.06 1704.72,1543.31 1704.72,1377.95 1712.6,1370.08 1803.15,1370.08 1811.02,1377.95 1811.02,1547.24 1822.83,1559.06 1988.19,1559.06 2000,1547.24 2000,1511.81 2007.87,1503.94 2023.62,1503.94 2078.74,1503.94 2098.43,1484.25 2110.24,1472.44 2110.24,1440.94 2110.24,1417.32 2133.86,1393.7 2456.69,1393.7 2496.06,1354.33 2685.04,1354.33 2712.6,1326.77 2712.6,1259.84 2712.6,1208.66 2712.6,1204.72 2720.47,1196.85 2767.72,1196.85 2862.2,1196.85 2877.95,1212.6 2877.95,1346.46 2854.33,1370.08 2854.33,1972.44 842.52,1972.44 681.1,2133.86
GND on Top Layer "Top Layer-No Net 1" (solid, remove dead copper, pour order 72): 129.92,1519.69 39.37,1519.69 0,1559.06 0,1566.93 0,2133.86 511.81,2133.86 681.1,2133.86 681.1,1921.26 425.2,1921.26 377.95,1921.26 346.46,1889.76 200.79,1889.76 149.61,1838.58 149.61,1645.67 196.85,1598.43 196.85,1551.18 196.85,1547.24 169.29,1519.69
P8V5 on Top Layer "Top Layer-No Net 1" (solid, remove dead copper, pour order 54): 1818.9,1259.84 1877.95,1259.84 1889.76,1259.84 1992.13,1362.2 2444.88,1362.2 2464.57,1342.52 2464.57,1169.29 2440.94,1145.67 2232.28,1145.67 2200.79,1114.17 2188.98,1102.36 2051.18,1102.36 2043.31,1102.36 1964.57,1023.62 1901.57,960.63 1822.83,960.63 1775.59,960.63 1763.78,972.44 1763.78,1248.03 1775.59,1259.84
NetC24_1 on Top Layer "Top Layer-No Net 1" (solid, remove dead copper, pour order 51): 1622.05,1377.95 1688.98,1377.95 1692.91,1374.02 1692.91,1326.77 1692.91,1303.15 1724.41,1271.65 1724.41,968.5 1716.54,960.63 1610.24,960.63 1598.43,972.44 1598.43,1082.68 1574.8,1106.3 1433.07,1106.3 1417.32,1122.05 1417.32,1271.65 1440.94,1295.28 1468.5,1295.28 1511.81,1295.28 1578.74,1295.28 1594.49,1311.02 1602.36,1318.9 1602.36,1334.65 1602.36,1374.02 1606.3,1377.95
VBAT on Top Layer "Top Layer-No Net 1" (solid, remove dead copper, pour order 46): 637.8,1649.61 862.2,1649.61 897.64,1649.61 944.88,1649.61 968.5,1625.98 980.32,1614.17 1007.87,1614.17 1086.61,1614.17 1110.24,1590.55 1153.54,1590.55 1161.42,1590.55 1181.1,1570.87 1228.35,1570.87 1259.84,1570.87 1338.58,1492.13 1401.57,1429.13 1688.98,1429.13 1692.91,1425.2 1692.91,1397.64 1688.98,1393.7 1598.43,1393.7 1586.61,1381.89 1582.68,1377.95 1582.68,1370.08 1582.68,1334.65 1570.87,1322.83 1535.43,1322.83 1429.13,1322.83 1401.57,1295.28 1389.76,1283.46 1389.76,692.91 1421.26,661.42 1685.04,661.42 1688.98,657.48 1688.98,625.98 1685.04,622.05 1602.36,622.05 1578.74,598.43 1578.74,562.99 1551.18,535.43 1204.72,535.43 1110.24,629.92 1110.24,1358.27 1082.68,1385.83 1055.12,1413.39 850.39,1413.39 751.97,1413.39 610.24,1555.12 610.24,1614.17 610.24,1629.92 629.92,1649.61
NetC6_1 on Top Layer "Top Layer-No Net 1" (solid, remove dead copper, pour order 44): 220.47,1610.24 255.91,1610.24 279.53,1610.24 311.02,1641.73 311.02,1665.35 389.76,1744.09 523.62,1744.09 578.74,1688.98 740.16,1688.98 921.26,1688.98 940.94,1708.66 940.94,1870.08 925.2,1885.83 460.63,1885.83 440.94,1866.14 381.89,1866.14 374.02,1858.27 212.6,1858.27 181.1,1826.77 181.1,1649.61
PGND on Top Layer "Top Layer-No Net 1" (solid, remove dead copper, pour order 39): 460.63,1527.56 543.31,1527.56 586.61,1527.56 655.51,1458.66 708.66,1405.51 749.35,1364.82 749.35,517.07 696.85,464.57 696.85,279.53 681.1,263.78 633.86,263.78 618.11,279.53 618.11,755.91 555.12,818.9 523.62,850.39 523.62,925.2 523.62,1047.24 492.13,1078.74 401.57,1078.74 307.09,1078.74 291.34,1094.49 291.34,1334.65 342.52,1385.83 362.2,1405.51 362.2,1480.31 362.2,1500 389.76,1527.56
GND on Top Layer "Top Layer-No Net 1" (solid, remove dead copper, pour order 71): 4889.76,2165.35 5283.46,2165.35 5326.77,2165.35 5338.58,2165.35 5358.27,2145.67 5358.27,2141.73 5358.27,1909.45 5358.27,1885.83 5338.58,1866.14 4822.83,1866.14 4803.15,1885.83 4803.15,2145.67 4822.83,2165.35
GND on Top Layer "Top Layer-No Net 1" (solid, remove dead copper, pour order 70): 4807.09,503.94 4858.27,503.94 4874.02,503.94 4889.76,519.68 4889.76,700.79 4874.02,716.54 4787.4,716.54 4771.65,700.79 4771.65,519.69 4787.4,503.94
P3V3 on Top Layer "Top Layer-No Net 1" (solid, remove dead copper, pour order 61): 3307.09,1173.23 3456.69,1173.23 3472.44,1188.98 3472.44,1755.91 3460.63,1767.72 3303.15,1767.72 3291.34,1755.91 3291.34,1188.98
CORE-PWR on Top Layer "Top Layer-No Net 1" (solid, remove dead copper, pour order 62): 4216.54,1173.23 4055.12,1173.23 4039.37,1188.98 4039.37,1751.97 4055.12,1767.72 4216.54,1767.72 4232.28,1751.97 4232.28,1188.98
P5V0 on Top Layer "Top Layer-No Net 1" (solid, remove dead copper, pour order 63): 4929.13,177.17 5082.68,177.17 5098.43,192.91 5098.43,767.72 5086.61,779.53 4925.2,779.53 4913.39,767.72 4913.39,192.91
M3V3 on Top Layer "Top Layer-No Net 1" (solid, remove dead copper, pour order 64): 4799.21,2267.72 4746.06,2267.72 4645.67,2267.72 4633.86,2279.53 4633.86,2468.5 4673.23,2507.87 4673.23,2625.98 4681.1,2633.86 4736.22,2633.86 4744.09,2625.98 4744.09,2523.62 4783.46,2484.25 4791.34,2476.38 4862.2,2476.38 5338.58,2476.38 5358.27,2456.69 5358.27,2413.39 5358.27,2287.4 5338.58,2267.72
P3V3 on Top Layer "Top Layer-No Net 1" (solid, remove dead copper, pour order 65): 4527.56,2303.15 4562.99,2303.15 4570.87,2303.15 4578.74,2311.02 4578.74,2397.64 4578.74,2452.76 4570.87,2460.63 4444.88,2460.63 4437.01,2452.76 4437.01,2311.02 4444.88,2303.15 4519.68,2303.15
M3V3 on Top Layer "Top Layer-No Net 1" (solid, remove dead copper, pour order 66): 4673.23,2614.17 4673.23,2681.1 4673.23,2685.04 4637.8,2720.47 4637.8,3673.23 4673.23,3708.66 4673.23,3818.9 4681.1,3826.77 4736.22,3826.77 4744.09,3818.9 4744.09,3708.66 4767.72,3685.04 4779.53,3673.23 4779.53,3559.06 4779.53,2720.47 4744.09,2685.04 4744.09,2614.17
OTG-SH-GND on Top Layer "Top Layer-No Net 1" (solid, remove dead copper, pour order 67): 1775.59,4850.39 1866.14,4850.39 1944.88,4850.39 1956.69,4862.2 1956.69,5062.99 1972.44,5078.74 2185.04,5078.74 2200.79,5062.99 2200.79,4862.2 2212.6,4850.39 2366.14,4850.39 2381.89,4866.14 2381.89,5196.85 2362.2,5216.54 1763.78,5216.54 1748.03,5200.79 1748.03,4862.2 1759.84,4850.39
GPS-PWR on Top Layer "Top Layer-No Net 1" (solid, remove dead copper, pour order 68): 535.43,3496.06 578.74,3496.06 598.43,3496.06 610.24,3484.25 653.54,3484.25 661.42,3476.38 661.42,3354.33 645.67,3338.58 590.55,3283.46 590.55,3240.16 590.55,3232.28 598.43,3224.41 610.24,3224.41 692.91,3224.41 759.84,3224.41 767.72,3216.54 767.72,3192.91 759.84,3185.04 535.43,3185.04 511.81,3208.66 511.81,3488.19 519.68,3496.06
P3V3 on Top Layer "Top Layer-No Net 1" (solid, remove dead copper, pour order 69): 566.93,3551.18 586.61,3551.18 629.92,3551.18 637.8,3559.06 637.8,3677.17 637.8,3681.1 629.92,3688.98 578.74,3688.98 559.06,3688.98 551.18,3681.1 551.18,3559.06 559.06,3551.18
NetF1_2 on Top Layer "Top Layer-No Net 1" (solid, remove dead copper, pour order 40): 480.32,263.78 515.75,263.78 578.74,263.78 590.55,275.59 590.55,740.16 574.8,755.91 440.94,755.91 425.2,740.16 425.2,275.59 437.01,263.78
PWRIN on Top Layer "Top Layer-No Net 1" (solid, remove dead copper, pour order 42): 173.23,492.13 263.78,492.13 381.89,492.13 397.64,507.87 397.64,748.03 421.26,771.65 429.13,779.53 476.38,779.53 480.32,779.53 496.06,795.28 496.06,1031.5 480.32,1047.24 307.09,1047.24 291.34,1031.5 291.34,830.71 240.16,779.53 236.22,775.59 169.29,775.59 137.8,775.59 125.98,763.78 125.98,507.87 141.73,492.13
NetC1_1 on Top Layer "Top Layer-No Net 1" (solid, remove dead copper, pour order 47): 137.8,803.15 106.3,803.15 35.43,803.15 19.68,818.9 19.68,1472.44 39.37,1492.13 177.17,1492.13 212.6,1527.56 283.46,1527.56 307.09,1503.94 307.09,1413.39 307.09,1389.76 263.78,1346.46 263.78,1275.59 263.78,842.52 224.41,803.15
NetC14_1 on Top Layer "Top Layer-No Net 1" (solid, remove dead copper, pour order 43): 1622.05,606.3 1685.04,606.3 1688.98,602.36 1688.98,515.75 1720.47,484.25 1720.47,200.79 1708.66,188.98 1606.3,188.98 1594.49,200.79 1594.49,303.15 1570.87,326.77 1559.06,338.58 1456.69,338.58 1417.32,338.58 1397.64,358.27 1397.64,496.06 1409.45,507.87 1562.99,507.87 1602.36,547.24 1602.36,578.74 1602.36,598.43 1610.24,606.3
NetC23_1 on Top Layer "Top Layer-No Net 1" (solid, remove dead copper, pour order 53): 3031.5,1440.94 3039.37,1440.94 3043.31,1437.01 3043.31,1433.07 3043.31,1385.83 3043.31,1374.02 3055.12,1362.2 3086.61,1362.2 3098.42,1374.02 3098.43,1417.32 3098.43,1460.63 3098.43,1480.31 3110.24,1492.13 3251.97,1492.13 3259.84,1484.25 3259.84,1188.98 3248.03,1177.17 3244.09,1173.23 3204.72,1173.23 3043.31,1173.23 3027.56,1188.98 3027.56,1437.01
NetC12_1 on Top Layer "Top Layer-No Net 1" (solid, remove dead copper, pour order 56): 3779.53,1440.94 3787.4,1440.94 3791.34,1437.01 3791.34,1377.95 3803.15,1366.14 3834.65,1366.14 3846.46,1377.95 3846.46,1472.44 3862.2,1488.19 3996.06,1488.19 4007.87,1476.38 4007.87,1188.98 3992.13,1173.23 3791.34,1173.23 3775.59,1188.98 3775.59,1437.01 3779.53,1440.94
NetC33_1 on Top Layer "Top Layer-No Net 1" (solid, remove dead copper, pour order 57): 4657.48,440.94 4665.35,440.94 4669.29,437.01 4669.29,377.95 4677.17,370.08 4685.04,362.2 4704.72,362.2 4720.47,362.2 4732.28,374.02 4732.28,464.57 4744.09,476.38 4877.95,476.38 4885.83,468.5 4885.83,192.91 4870.08,177.17 4669.29,177.17 4653.54,192.91 4653.54,437.01 4657.48,440.94
MAIN-PWR on Top Layer "Top Layer-No Net 1" (solid, remove dead copper, pour order 58): 2905.51,1342.52 2925.2,1362.2 2984.25,1362.2 3000,1377.95 3000,1437.01 3003.94,1440.94 3015.75,1440.94 3019.68,1437.01 3019.68,1377.95 3019.68,1354.33 3015.75,1350.39 3015.75,1322.83 3015.75,1153.54 3039.37,1129.92 3192.91,1129.92 3625.98,1129.92 3657.48,1161.42 3657.48,1307.09 3681.1,1330.71 3688.98,1338.58 3712.6,1338.58 3748.03,1374.02 3748.03,1437.01 3751.97,1440.94 3763.78,1440.94 3767.72,1437.01 3767.72,1338.58 3763.78,1334.65 3763.78,1157.48 3791.34,1129.92 3881.89,1039.37 3881.89,500 4035.43,346.46 4598.42,346.46 4625.98,374.02 4625.98,437.01 4629.92,440.94 4641.73,440.94 4645.67,437.01 4645.67,338.58 4641.73,334.65 4641.73,224.41 4629.92,212.6 3956.69,212.6 3744.09,425.2 3744.09,952.76 3688.98,1007.87 2704.72,1007.87 2677.17,980.31 2519.68,980.31 2500,1000 2500,1149.61 2500,1314.96 2511.81,1326.77 2673.23,1326.77 2685.04,1314.96 2685.04,1188.98 2704.72,1169.29 2885.83,1169.29 2905.51,1188.98
GND on Top Layer "Top Layer-No Net 1" (solid, remove dead copper, pour order 59): 118.11,397.64 362.2,397.64 389.76,370.08 389.76,263.78 417.32,236.22 460.63,236.22 641.73,236.22 909.45,236.22 944.88,271.65 944.88,448.82 787.4,606.3 787.4,1338.58 814.96,1366.14 1043.31,1366.14 1074.8,1334.65 1074.8,610.24 1169.29,515.75 1177.17,507.87 1303.15,507.87 1342.52,507.87 1362.2,488.19 1362.2,334.65 1397.64,299.21 1551.18,299.21 1566.93,283.46 1566.93,185.04 1598.43,153.54 1921.26,153.54 2031.5,263.78 2059.06,291.34 2090.55,291.34 2125.98,291.34 2137.8,291.34 2177.17,330.71 2665.35,330.71 3759.84,330.71 3917.32,173.23 4055.12,173.23 4244.09,173.23 4625.98,173.23 4665.35,133.86 4692.91,133.86 5043.31,133.86 5110.24,133.86 5145.67,169.29 5145.67,224.41 5145.67,393.7 5511.81,393.7 5511.81,0 0,0 0,263.78 0,362.2 35.43,397.64
GND on Top Layer "Top Layer-No Net 1" (solid, remove dead copper, pour order 60): 1480.32,1066.93 1515.75,1066.93 1559.06,1066.93 1570.87,1055.12 1570.87,700.79 1559.06,688.98 1429.13,688.98 1417.32,700.79 1417.32,1055.12 1429.13,1066.93
P8V0 on Top Layer "Top Layer-No Net 1" (solid, remove dead copper, pour order 48): 1826.77,188.98 1846.46,188.98 1905.51,188.98 1940.94,224.41 2039.37,322.83 2062.99,322.83 2118.11,322.83 2149.61,354.33 2157.48,362.2 2236.22,362.2 2409.45,362.2 2421.26,374.02 2421.26,531.5 2409.45,543.31 1964.57,543.31 1905.51,484.25 1775.59,484.25 1763.78,472.44 1763.78,204.72 1779.53,188.98
NetD5_2 on Top Layer "Top Layer-No Net 1" (solid, remove dead copper, pour order 50): 2551.18,362.2 2539.37,362.2 2488.19,362.2 2476.38,374.02 2476.38,527.56 2472.44,531.5 2433.07,570.87 2401.57,570.87 2303.15,570.87 2287.4,570.87 2279.53,578.74 2279.53,669.29 2287.4,677.17 2618.11,677.17 2625.98,669.29 2625.98,374.02 2614.17,362.2
NetC17_1 on Top Layer "Top Layer-No Net 1" (solid, remove dead copper, pour order 52): 2275.59,775.59 2913.39,775.59 2929.13,791.34 2929.13,960.63 2913.39,976.38 2724.41,976.38 2700.79,952.76 2696.85,948.82 2633.86,948.82 2578.74,948.82 2480.31,948.82 2464.57,964.57 2464.57,1106.3 2448.82,1122.05 2275.59,1122.05 2259.84,1106.3 2259.84,791.34
GND on Top Layer "Top Layer-No Net 1" (solid, remove dead copper, pour order 55): 2003.94,1015.75 2059.05,1070.87 2157.48,1070.87 2173.23,1055.12 2173.23,748.03 2157.48,732.28 2011.81,732.28 2003.94,740.16
GND on Bottom Layer "Top Layer-No Net 1" (solid, remove dead copper, pour order 76): 0,0 0,755.9 39.37,795.28 125.98,795.28 248.03,795.28 291.34,751.97 417.32,751.97 500,751.97 527.56,779.53 527.56,842.52 527.56,996.06 606.3,1074.8 606.3,1480.31 543.31,1543.31 527.56,1559.06 480.32,1559.06 192.91,1559.06 149.61,1515.75 74.8,1515.75 51.18,1515.75 0,1566.93 0,5236.22 5511.81,5236.22 5511.81,0
PGND on Bottom Layer "Top Layer-No Net 1" (solid, remove dead copper, pour order 41): 417.32,1527.56 511.81,1527.56 574.8,1464.57 574.8,1090.55 562.99,1078.74 303.15,1078.74 291.34,1090.55 291.34,1358.27 326.77,1393.7 338.58,1405.51 338.58,1460.63 338.58,1476.38 389.76,1527.56
PWRIN on Bottom Layer "Top Layer-No Net 1" (solid, remove dead copper, pour order 45): 338.58,1047.24 417.32,1047.24 480.32,1047.24 496.06,1031.5 496.06,795.28 480.31,779.53 307.09,779.53 291.34,795.28 291.34,1031.5 307.09,1047.24
NetC1_1 on Bottom Layer "Top Layer-No Net 1" (solid, remove dead copper, pour order 49): 129.92,822.83 181.1,822.83 248.03,822.83 267.72,842.52 267.72,1370.08 303.15,1405.51 311.02,1413.39 311.02,1460.63 311.02,1507.87 295.28,1523.62 208.66,1523.62 149.61,1464.57 78.74,1464.57 43.31,1464.57 19.68,1440.94 19.68,1035.43 19.68,842.52 39.37,822.83
GND on Internal Plane 1 (split plane): 5491.71,20.1 20.1,20.1 20.1,732.28 625.98,732.28 625.98,1370.08 20.1,1370.08 20.1,5216.12 5491.71,5216.12
CORE-PWR on Internal Plane 2 (split plane): 4227.19,1568.09 3497.22,1568.09 3497.22,2830.71 3496.84,2832.66 3495.73,2834.31 3494.08,2835.42 3492.13,2835.81 3036.59,2835.81 3036.59,3022.46 4227.19,3022.46
P5V0 on Internal Plane 2 (split plane): 5491.71,20.1 4902.74,20.1 4902.74,614.17 4902.35,616.12 4901.24,617.78 4899.59,618.88 4897.64,619.27 4300.37,619.27 4300.37,1018.52 4610.24,1018.52 4612.19,1018.91 4613.84,1020.02 4614.95,1021.67 4615.33,1023.62 4615.33,1746.87 5491.71,1746.87
no net on Internal Plane 2 (split plane): 5491.71,1757.07 4615.33,1757.07 4615.33,1870.08 4615.33,4685.04 4614.95,4686.99 4613.84,4688.64 4612.19,4689.75 4610.24,4690.14 2893.7,4690.14 2891.75,4689.75 2890.1,4688.64 2888.99,4686.99 2888.6,4685.04 2888.6,4237.38 1638.96,4237.38 1638.96,5216.12 5491.71,5216.12
P3V3 on Internal Plane 2 (split plane): 1628.76,4232.28 1629.15,4230.33 1630.25,4228.68 1631.91,4227.57 1633.86,4227.19 2893.7,4227.19 2895.65,4227.57 2897.31,4228.68 2898.41,4230.33 2898.8,4232.28 2898.8,4679.94 4605.14,4679.94 4605.14,1870.08 4605.14,1028.72 4237.38,1028.72 4237.38,1515.75 4237.38,3027.56 4236.99,3029.51 4235.89,3031.16 4234.23,3032.27 4232.28,3032.66 3031.5,3032.66 3029.55,3032.27 3027.89,3031.16 3026.79,3029.51 3026.4,3027.56 3026.4,2830.71 3026.79,2828.76 3027.89,2827.1 3029.55,2826 3031.5,2825.61 3487.03,2825.61 3487.03,1568.09 2835.81,1568.09 2835.81,1929.13 2835.42,1931.08 2834.31,1932.74 2832.66,1933.84 2830.71,1934.23 20.1,1934.23 20.1,5216.12 1628.76,5216.12

## Keep-outs
Keep-Out Layer:
  the board outline again, w10

## Other copper
Top Layer:
  pour cut-out: 275.59,2500 377.95,2500 377.95,2370.08 275.59,2370.08
  pour cut-out: 5165.35,2818.9 5307.09,2818.9 5307.09,2724.41 5165.35,2724.41
  pour cut-out: 3145.67,2960.63 3366.14,2960.63 3366.14,2283.46 3362.2,2279.53 3145.67,2279.53
  pour cut-out: 3145.67,4161.42 3366.14,4161.42 3366.14,3480.31 3145.67,3480.31
  pour cut-out: 885.83,3078.74 1106.3,3078.74 1106.3,2397.64 885.83,2397.64
  pour cut-out: 885.83,4043.31 1106.3,4043.31 1106.3,3366.14 885.83,3366.14
Internal Plane 1 (plane layer: these items are gaps in the copper):
  rectangle: 0,732.28 625.98,1370.08
Internal Plane 2 (plane layer: these items are gaps in the copper):
  rectangle: 0,0 2830.71,1929.13
  rectangle: 2814.96,0 4232.28,1562.99
  rectangle: 4224.41,3.94 4299.21,1023.62
  rectangle: 4295.28,0 4897.64,614.17
  lines w10: 0,1929.13 2830.71,1929.13 2830.71,1562.99 3492.13,1562.99 3492.13,2830.71 3031.5,2830.71 3031.5,3027.56 4232.28,3027.56 4232.28,1515.75 4232.28,1023.62 4610.24,1023.62 4610.24,1870.08 4610.24,4685.04 2893.7,4685.04 2893.7,4232.28 1633.86,4232.28 1633.86,5232.28 1629.92,5236.22 ; 3464.57,1562.99 4232.28,1562.99 ; 4295.28,1023.62 4295.28,614.17 4897.64,614.17 4897.64,0 ; 4610.24,1751.97 5511.81,1751.97

## Silkscreen, mask and mechanical layers (free items; w line width, h text height)
Top Overlay:
  lines w8: 275.59,4275.59 275.59,4527.56 787.4,4527.56 787.4,4275.59 275.59,4275.59
  text "DCETVT18P1M1-REV.1" at 2842.52,4834.65 h60
  text "BOOT MODE" at 295.28,4476.38 h35
  text "CLOSE: BOOTROM" at 295.28,4385.83 h35
  text "OPEN:  NORMAL" at 295.28,4322.83 h35
  text "TX" at 271.65,4074.8 h35
  text "RX" at 271.65,3980.31 h35
  text "GND" at 271.65,3877.95 h35
  text "DEBUG" at 118.11,3767.72 h35

## Text inside footprints (layer, text, board x,y; h text height)
C17: Top Overlay "+" at 2830.71,771.65 h27.56
C20: Top Overlay "+" at 3397.64,771.65 h27.56
C22: Top Overlay "+" at 3964.57,771.65 h27.56
D15: Top Overlay "+" at 486.22,4948.82 h27.56
D21: Top Overlay "+" at 1399.61,4948.82 h27.56
D22: Top Overlay "+" at 1171.26,4948.82 h27.56
D23: Top Overlay "+" at 942.91,4948.82 h27.56
D24: Top Overlay "+" at 714.57,4948.82 h43.31